# Altium PCB BLDC_Driver_1_1_2.PcbDoc
Units mil, origin at the board's own origin, x right, y up, seen from the top; angles counter-clockwise.
Board outline 3451 x 3780 mil, 2 copper layers (Top Layer, Bottom Layer); 63 components, 54 nets, 177 pads, 25 vias.
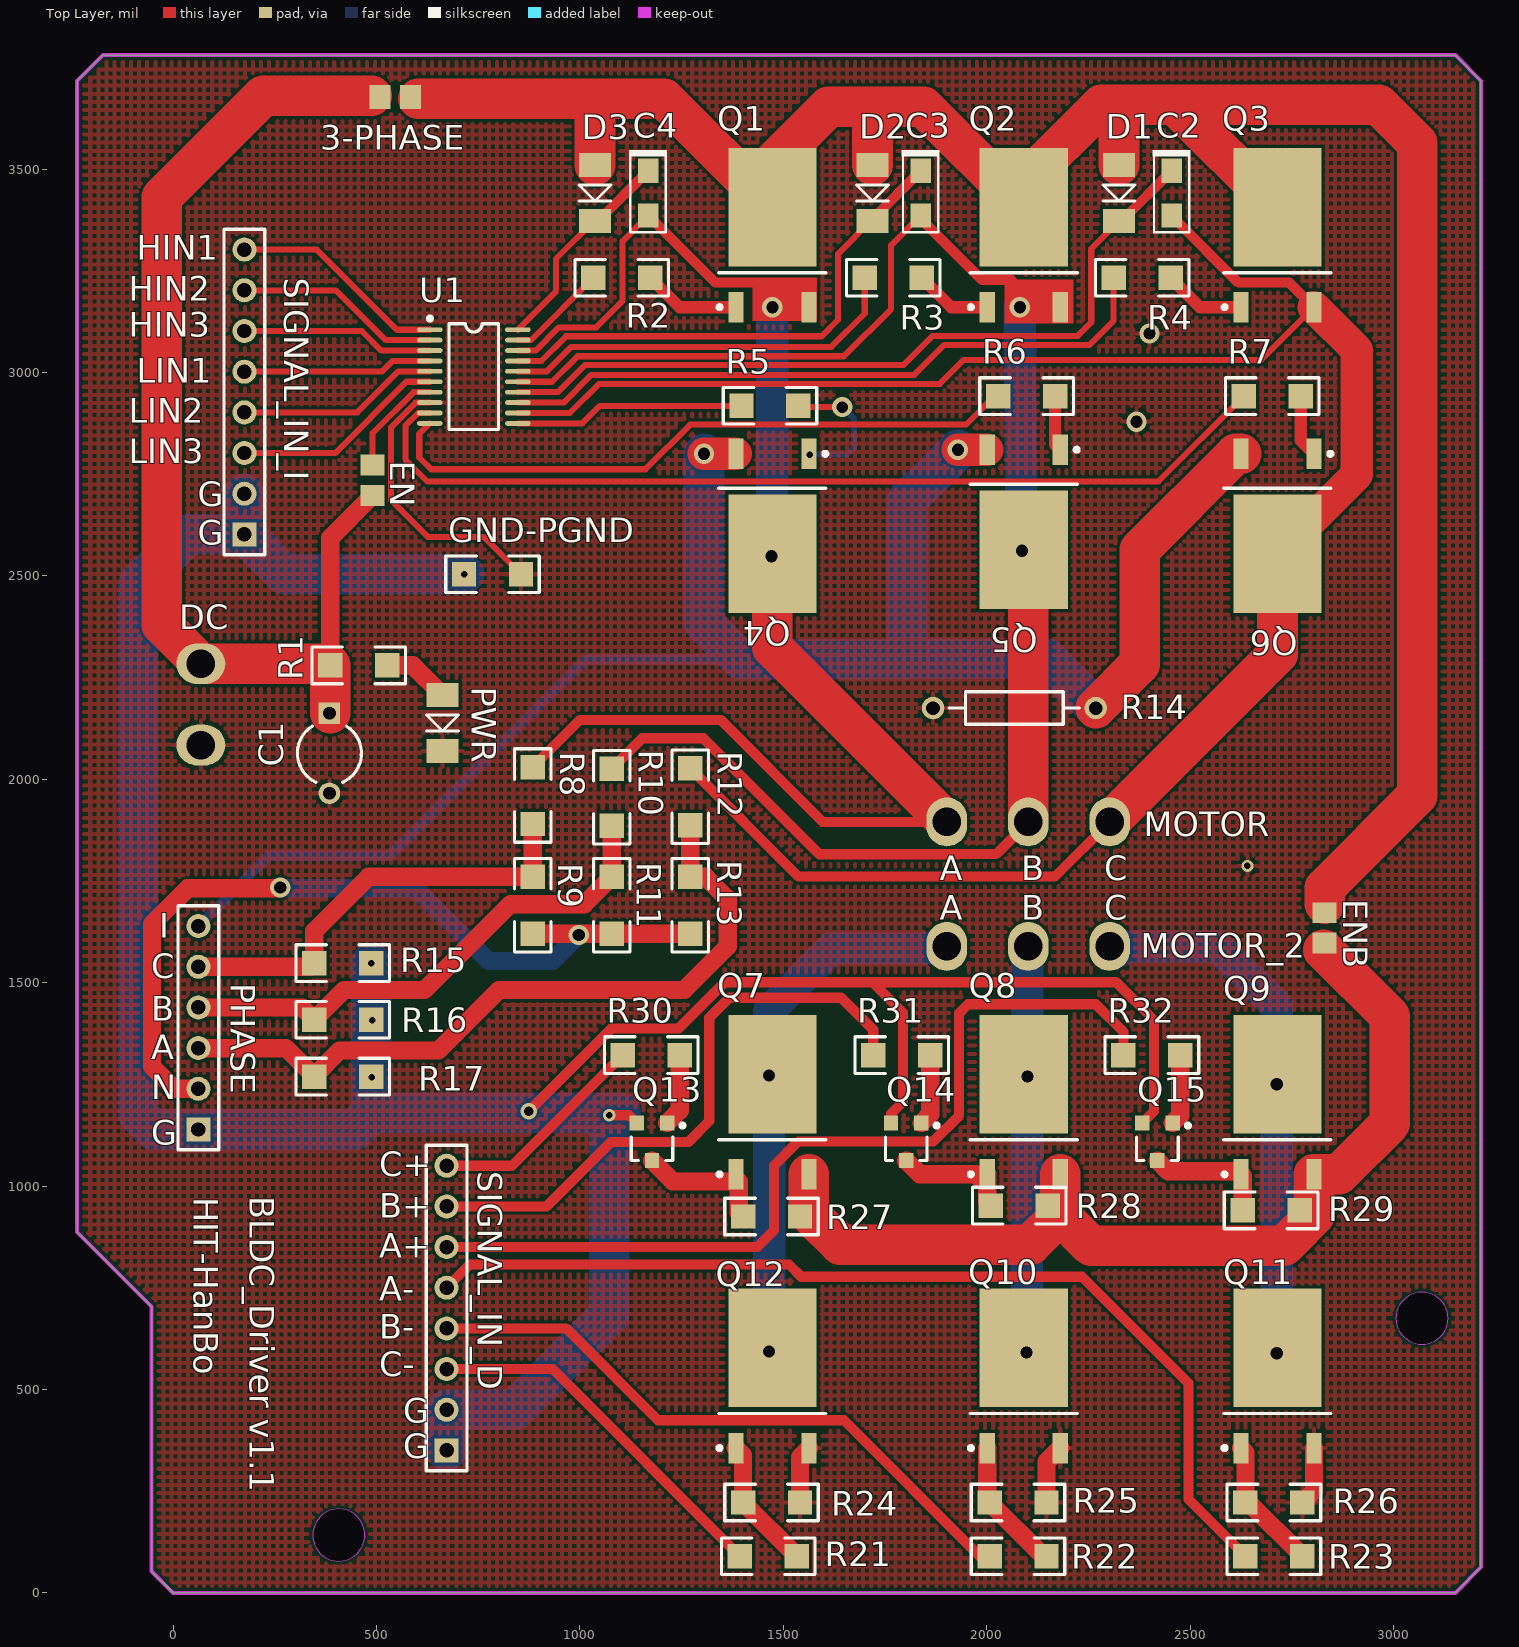
[diagram p0: Top Layer view]
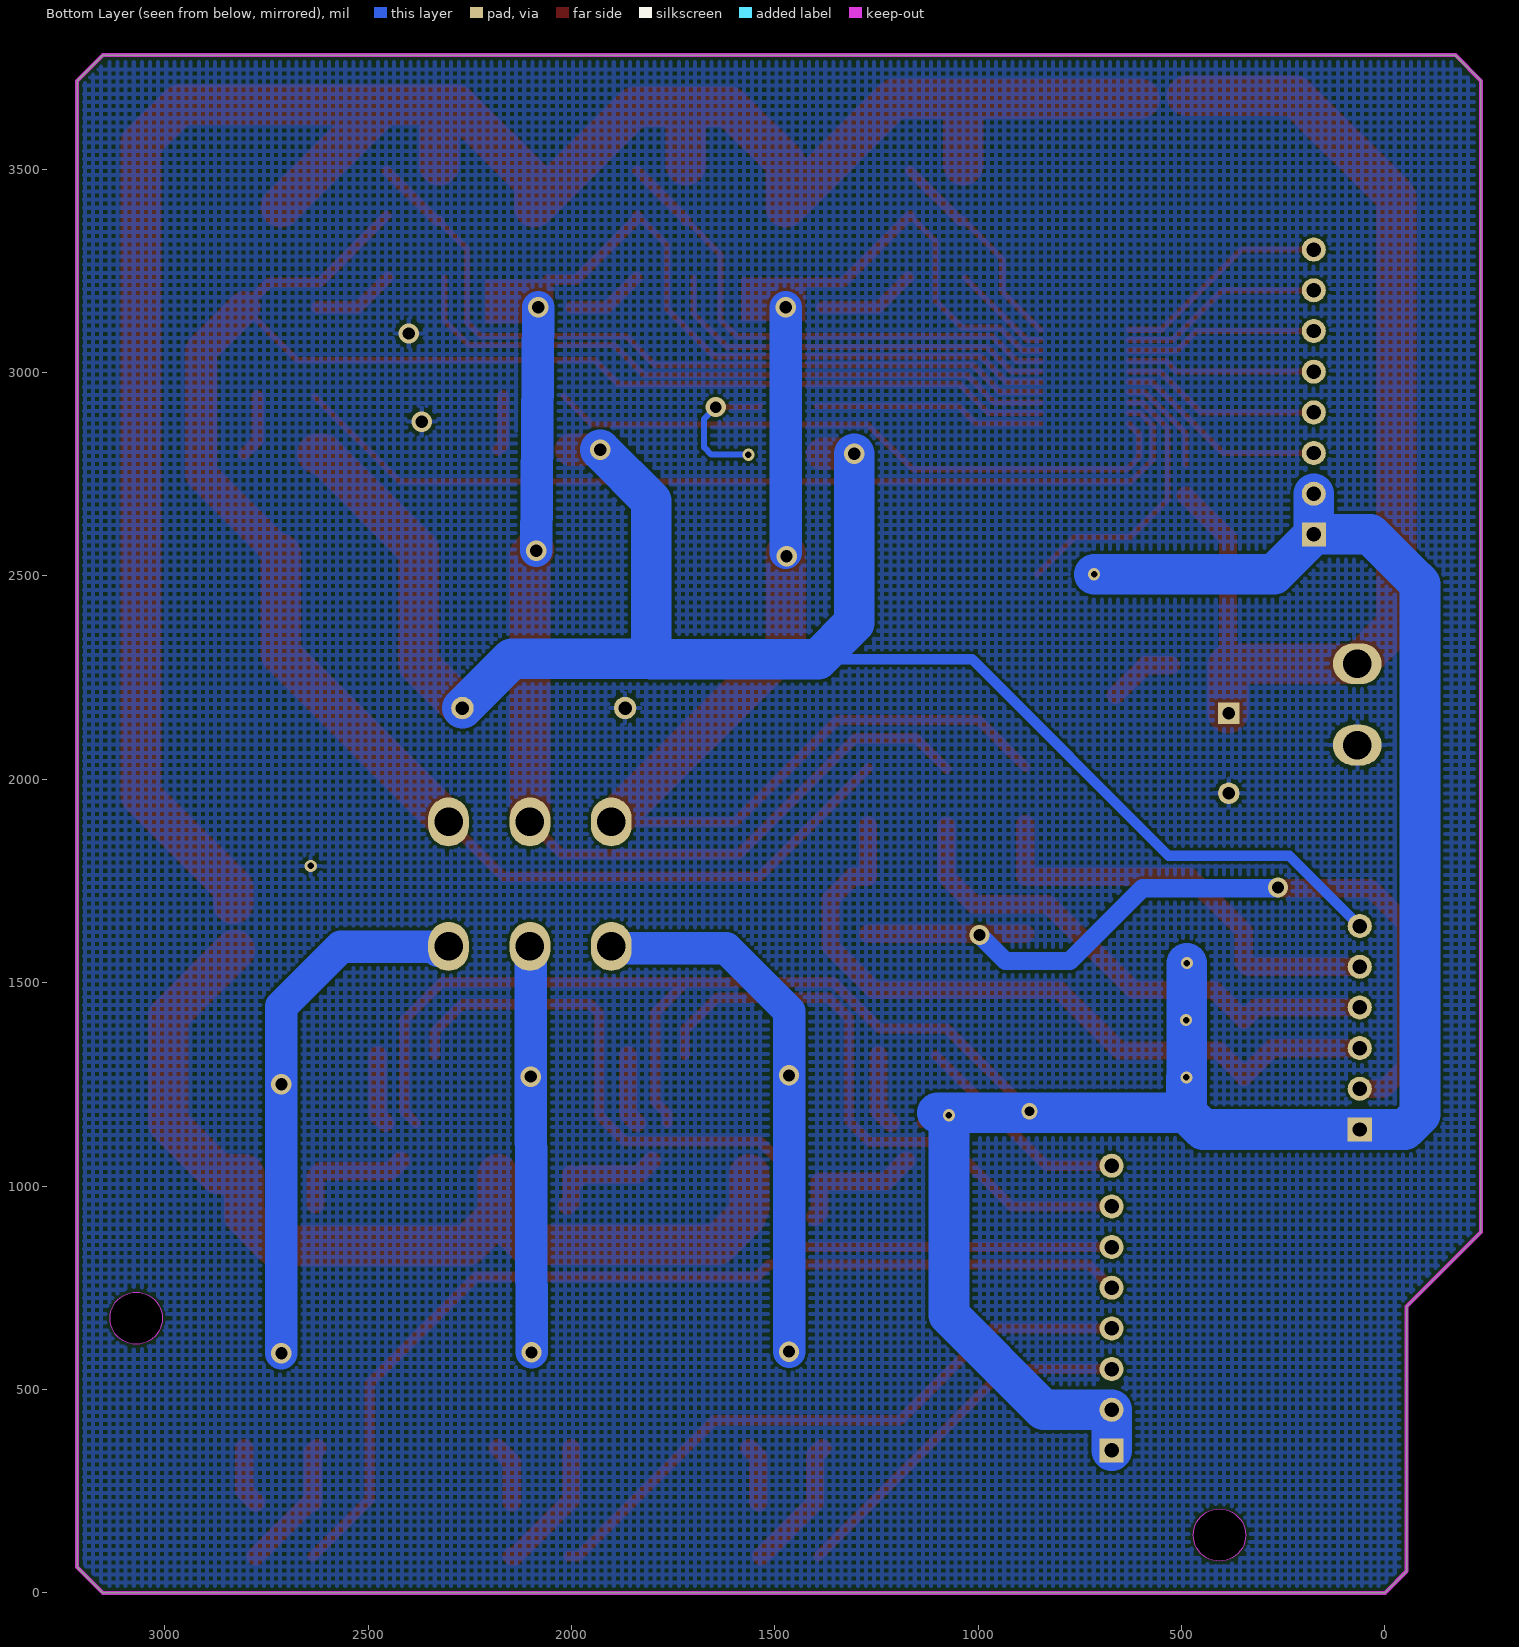
[diagram p1: Bottom Layer view, seen from below]

## Layer stack, top to bottom
Top Solder: solder mask 0.4, Solder Resist, Dk 3.5
Top Layer: signal copper 1.4
Dielectric 1: dielectric 12.6, FR-4, Dk 4.8
Bottom Layer: signal copper 1.4
Bottom Solder: solder mask 0.4, Solder Resist, Dk 3.5

## Board outline
-236,887 -53,704 -53,53 0,0 3152,0 3215,63 3215,3717 3152,3780 -173,3780 -236,3717
cut-out: 342.8,142 ccw(c407,142) 407,77.81 ccw(c407,142) 471.2,142 ccw(c407,142) 407,206.19 ccw(c407,142)
cut-out: 3005.81,675 ccw(c3070,675) 3070,610.81 ccw(c3070,675) 3134.19,675 ccw(c3070,675) 3070,739.19 ccw(c3070,675)

## Design rules (kind name [scope] priority, off if disabled: settings)
Clearance [All] p1: gap=7
PolygonConnect [All] p1: connectstyle=Relief reliefconductorwidth=10 reliefentries=4 polygonreliefangle="90 Angle" airgapwidth=10
RoutingVias [All] p1: holewidth=24 width=40 viastyle="Through Hole" minholewidth=18 minwidth=30 maxholewidth=28 maxwidth=50
SolderMaskExpansion [All] p1: expansion=4
Width [All] p1: maxlimit=100 minlimit=15 preferedwidth=20
30 further rules are at their usual default settings.

## Components (designator, comment, footprint, x,y, rotation, side; value= is the part's Value field where it differs from the comment)
3-PHASE "Res2" 0805-2 546,3677 r180 top
C1 "Cap2" CAPR5-4X5 384,2064 r270 top
C2 "Cap Pol" CAP-3216 2455,3441 r270 top
C3 "Cap Pol" CAP-3216 1838,3441 r270 top
C4 "Cap Pol" CAP-3216 1168,3441 r270 top
D1 "D-Schottky" DIODE-1206 2325,3510 r270 top
D2 "D-Schottky" DIODE-1206 1719,3510 r270 top
D3 "D-Schottky" DIODE-1206 1037,3510 r270 top
DC "JXZ2" JXZ2 68,2184 r90 top
EN "Res2" 0805-2 490,2735 r270 top
ENB "Res2" 0805-2 2830,1634.6 r90 top
GND-PGND "Res2" 1206 785,2504 r180 top
MOTOR "JXZ3" JXZ_3 2102,1895 r0 top
MOTOR_2 "JXZ3" JXZ_3 2102,1589 r0 top
PHASE "Header 6" HDR1X6 62,1139 r90 top
PWR "LED2" DIODE-1206 662,2207 r270 top
Q1 "IRFR1205" TO-252AA_N 1473,3337.62 r90 top
Q2 "IRFR1205" TO-252AA_N 2091.01,3337.62 r90 top
Q3 "IRFR1205" TO-252AA_N 2714.67,3337.62 r90 top
Q4 "IRFR1205" TO-252AA_N 1473,2622.9 r270 top
Q5 "IRFR1205" TO-252AA_N 2091.01,2632.9 r270 top
Q6 "IRFR1205" TO-252AA_N 2714.67,2623 r270 top
Q7 "IRFR5305" TO-252AA_N 1473,1206.1 r90 top
Q8 "IRFR5305" TO-252AA_N 2091.01,1206.1 r90 top
Q9 "IRFR5305" TO-252AA_N 2714.67,1206.1 r90 top
Q10 "IRFR1205" TO-252AA_N 2091.01,533 r90 top
Q11 "IRFR1205" TO-252AA_N 2714.67,533 r90 top
Q12 "IRFR1205" TO-252AA_N 1473,533 r90 top
Q13 "PDTC143ET" SOT-23 1177,1108.74 r180 top
Q14 "PDTC143ET" SOT-23 1802,1108.74 r180 top
Q15 "PDTC143ET" SOT-23 2419.6,1108.74 r180 top
R1 "Res2" 1206 456,2280 r180 top
R2 "Res2" 1206 1103,3233 r0 top
R3 "Res2" 1206 1770,3233 r0 top
R4 "Res2" 1206 2382,3233 r0 top
R5 "Res2" 1206 1467,2918 r0 top
R6 "Res2" 1206 2098,2942 r0 top
R7 "Res2" 1206 2702,2942 r0 top
R8 "Res2" 1206 884,1960 r270 top
R9 "Res2" 1206 884,1690 r270 top
R10 "Res2" 1206 1078,1956 r270 top
R11 "Res2" 1206 1078,1690 r270 top
R12 "Res2" 1206 1271,1957 r270 top
R13 "Res2" 1206 1271,1690 r270 top
R14 "Res2" AXIAL-0.4 2068,2175 r0 top
R15 "Res2" 1206 417,1548 r180 top
R16 "Res2" 1206 417,1409 r180 top
R17 "Res2" 1206 417,1269 r180 top
R21 "Res2" 1206 1463,90 r0 top
R22 "Res2" 1206 2077,90 r0 top
R23 "Res2" 1206 2706,90 r0 top
R24 "Res2" 1206 1471,222 r180 top
R25 "Res2" 1206 2077,222 r180 top
R26 "Res2" 1206 2706,222 r180 top
R27 "Res2" 1206 1471,925 r0 top
R28 "Res2" 1206 2080,952 r0 top
R29 "Res2" 1206 2699,940 r0 top
R30 "Res2" 1206 1175,1322 r0 top
R31 "Res2" 1206 1791,1322 r0 top
R32 "Res2" 1206 2406,1322 r0 top
SIGNAL_IN_D "Header 8" HDR1X8 672,350 r90 top
SIGNAL_IN_I "Header 8" HDR1X8 175,2602 r90 top
U1 "FD6288T" TSSOP20 739,2990 r270 top

## Footprints (in the part's own frame and the unit in brackets; to place one, negate y for a bottom-side part, rotate by r counter-clockwise, add the part's x,y. Pads: shape width x height; smd on the part's side, far side on the other; paste and mask are expansions set on the pad)
0805-2 [mm] "贴片无丝印"
  rect 1.3x1.5 smd: 1(-0.95,0) 2(0.95,0)
1206 [mil] "贴片元件"
  rect 60x60 smd: 1(-70,0) 2(70,0)
  silkscreen extent -115,-45 115,45, body extent -75,-35 75,35, height 39
AXIAL-0.4 [mm] "Axial Device, Thru-Hole; 2 Leads; 0.4 in Pin Spacing"
  round 1.4 hole 0.85: 1(-5.08,0) 2(5.08,0)
  silkscreen extent -4.06,-1.02 4.06,1.02
CAP-3216 [mil] "钽电容"
  rect 60x50 smd: 1(-55,0) 2(55,0)
  silkscreen extent -106,-48 96,46
CAPR5-4X5 [mm] "Capacitor; 2 Leads"
  rect 1.35x1.35 hole 0.8: 1(-2.5,0)
  round 1.35 hole 0.8: 2(2.5,0)
  silkscreen extent -1.69,-2 1.82,2
DIODE-1206 [mm] "玻璃封装二极管"
  rect 1.5x2 smd: 1(0,0) 2(3.5,0)
  silkscreen extent 1.25,-1 2.25,1
HDR1X6 [mm] "Connector; Header; 6 Position"
  rect 1.5x1.5 hole 0.9: 1(0,0)
  round 1.5 hole 0.9: 2(2.54,0) 3(5.08,0) 4(7.62,0) 5(10.16,0) 6(12.7,0)
  silkscreen extent -1.27,-1.27 13.97,1.27
HDR1X8 [mm] "Connector; Header; 8 Position"
  rect 1.5x1.5 hole 0.9: 1(0,0)
  round 1.5 hole 0.9: 2(2.54,0) 3(5.08,0) 4(7.62,0) 5(10.16,0) 6(12.7,0) 7(15.24,0) 8(17.78,0)
  silkscreen extent -1.27,-1.27 19.05,1.27
JXZ2 [mil]
  oval 100x120 hole 70: 1(100,0) 2(-100,0)
JXZ_3 [mil]
  oval 100x120 hole 70: 1(-200,0) 2(0,0) 3(200,0)
SOT-23 [mm]
  rect 0.9x0.95 smd: 1(-0.95,-1.175) 2(0.95,-1.175) 3(0,1.175)
  silkscreen extent -2.03,-1.14 1.3,1.18
TO-252AA_N [mm] "D-PAK, 4-Leads, Body 6.1x6.5mm, Pitch 2.28mm, Lead Span 9.9mm, IPC Medium Density"
  rect 1.9x0.95 smd: 1(-4.5,2.28) 3(-4.5,-2.28)
  rect 7.4x5.5 smd: 4(1.75,0)
  silkscreen extent -4.62,-3.35 -2.35,3.43, body extent -2.25,-3.37 4.1,3.37, height 2.38
TSSOP20 [mm] "Shrink Small Outline; 20 Leads; Body Width 4.4 mm; Pitch 0.65 mm"
  oval 0.3x1.6 smd: 1(-2.925,-2.75) 2(-2.275,-2.75) 3(-1.625,-2.75) 4(-0.975,-2.75) 5(-0.325,-2.75) 6(0.325,-2.75) 7(0.975,-2.75) 8(1.625,-2.75) 9(2.275,-2.75) 10(2.925,-2.75) 11(2.925,2.75) 12(2.275,2.75) 13(1.625,2.75) 14(0.975,2.75) 15(0.325,2.75) 16(-0.325,2.75) 17(-0.975,2.75) 18(-1.625,2.75) 19(-2.275,2.75) 20(-2.925,2.75)
  silkscreen extent -3.75,-2.87 3.3,1.55, body extent -3.3,-1.91 3.3,1.91, height 1.1

## Part data
3-PHASE EN ENB GND-PGND R1 R2 R3 R4 R5 R6 R7 R8 R9 R10 R11 R12 R13 R14 R15 R16 R17 R21 R22 R23 R24 R25 R26 R27 R28 R29 R30 R31 R32: "Resistor"
C1: "Capacitor"
C2 C3 C4: "极性电解电容"
D1 D2 D3: "肖特基二极管"
PHASE: "Header, 6-Pin"
PWR: "Typical RED, GREEN, YELLOW, AMBER GaAs LED"
Q1 Q2 Q3 Q4 Q5 Q6 Q7 Q8 Q9 Q10 Q11 Q12: "HEXFET Power MOSFET"
Q13 Q14 Q15: library part SS8050, "NPN贴片三极管"
SIGNAL_IN_D SIGNAL_IN_I: "Header, 8-Pin"

## Via types
v1: diameter 50, hole 30, Top Layer to Bottom Layer, 16 vias
v2: diameter 30, hole 16, Top Layer to Bottom Layer, 7 vias
v3: diameter 50, hole 28, Top Layer to Bottom Layer, 1 vias
v4: diameter 40, hole 24, Top Layer to Bottom Layer, 1 vias

## Nets (pads, with @x,y where several pads share a name; then routed paths per layer and width w, separated by ;. In a path a pad name is that pad's centre, name@x,y a point inside that pad or via, vN(x,y) a via of type N, cw(c..) or ccw(c..) an arc to the next point about the centre after c; other vN are vias at no path point)
A+: R30.1 SIGNAL_IN_D.8 | length 545.7
  Top Layer w25: SIGNAL_IN_D.8 833,1050 R30.1
A-: R21.1 SIGNAL_IN_D.3 | length 911.5
  Top Layer w25: SIGNAL_IN_D.3 933,550 R21.1
B+: R31.1 SIGNAL_IN_D.7 | length 1505
  Top Layer w25: SIGNAL_IN_D.7 918,950 1076,1108 1266,1108 1318,1160 1318,1414 1367,1463 1642,1463 1721,1384 R31.1
B-: R22.1 SIGNAL_IN_D.4 | length 1567
  Top Layer w25: SIGNAL_IN_D.4 966,650 1192,424 1649,424 1983,90 R22.1
C+: R32.1 SIGNAL_IN_D.6 | length 2237.2
  Top Layer w25: SIGNAL_IN_D.6 1436,850 1477,891 1477,1050 1536.83,1109.83 1868.83,1109.83 1932,1173 1932,1425 1954,1447 2268,1447 2336,1379 R32.1
C-: R23.1 SIGNAL_IN_D.5 | length 2451.7
  Top Layer w25: SIGNAL_IN_D.5 729,807 1514,807 1544,777 2234.26,777 2496,515.26 2496,230 R23.1
DC-SEL: 3-PHASE.1 D1.1 D2.1 D3.1 ENB.2 Q1.4 Q2.4 Q3.4 | length 5807.7
  Top Layer w100: 3-PHASE.1@603,3673 1048,3673 ; D3.1 1037,3662 1048,3673 ; D2.1 1719,3653 ; D1.1 2325,3615 2282,3658 ; Q3.4 2463.19,3658 ; ENB.2@2831,1694 2831,1733 3058,1960 3058,3564 2964,3658 2463.19,3658 ; 1048,3673 1206.52,3673 Q1.4 1473,3515 1611,3653 1719,3653 ; 1719,3653 1844.53,3653 Q2.4 2091.01,3467.01 2282,3658 ; 2282,3658 2463.19,3658
DC_IN: 3-PHASE.2 C1.1 DC.1 EN.2 R1.2 | length 2697.8
  Top Layer w45: R1.2 386,2593.6 EN.2
  Top Layer w100: R1.2@381,2281 378,2284 DC.1 -28,2380 -28,3431 221,3680 3-PHASE.2@487.41,3680 ; C1.1@386,2162.43 R1.2
GND: GND-PGND.2 PHASE.1 Q13.2 Q14.2 Q15.2 R15.1 R16.1 R17.1 SIGNAL_IN_D.1 SIGNAL_IN_D.2 SIGNAL_IN_I.1 SIGNAL_IN_I.2 | length 7409.8
  Top Layer w25: v4(874,1184) 1077,1387 1242,1387 1356,1501 1719,1501 ; v2(1072,1174) 1120.6,1174 Q13.2 ; Q14.2 1764.6,1177.6 1794,1207 1794,1426 1719,1501 ; Q15.2 2411,1183.8 2411,1408 2318,1501 1719,1501
  Bottom Layer w25: v4(874,1184) v4@874,1185
  Bottom Layer w100: -80,2488 -80,2486 ; SIGNAL_IN_I.2 SIGNAL_IN_I.1 ; v2(487,1548) 487,1268 v2(488,1267) 488,1180 ; SIGNAL_IN_D.1 SIGNAL_IN_D.2 839,450 1072,683 v2(1072,1174) ; v2(715,2504) 273,2504 SIGNAL_IN_I.1 ; 1100,1180 488,1180 ; -80,2486 -86,2480 -86,1176 -49,1139 PHASE.1 447,1139 488,1180 ; -80,2486 36,2602 SIGNAL_IN_I.1
  other v2: 489,1408
HIN1: SIGNAL_IN_I.8 U1.1 | length 537.3
  Top Layer w15: SIGNAL_IN_I.8 353,3302 549.84,3105.16 U1.1
HIN2: SIGNAL_IN_I.7 U1.2 | length 506.4
  Top Layer w15: SIGNAL_IN_I.7 400,3202 522.43,3079.57 U1.2
HIN3: SIGNAL_IN_I.6 U1.3 | length 475.6
  Top Layer w15: SIGNAL_IN_I.6 464,3102 512.02,3053.98 U1.3
HO1: R2.1 U1.19 | length 249.3
  Top Layer w15: U1.19 879.57,3079.57 R2.1
HO2: R3.1 U1.16 | length 999.6
  Top Layer w15: U1.16 918.8,3002.8 979,3063 1618,3063 1700,3145 R3.1
HO3: R4.1 U1.13 | length 1654
  Top Layer w15: U1.13 960.02,2926.02 1028,2994 1822,2994 1896,3068 2253,3068 2312,3127 R4.1
LIN1: SIGNAL_IN_I.5 U1.4 | length 466.7
  Top Layer w15: SIGNAL_IN_I.5 513,3002 539.39,3028.39 U1.4
LIN2: SIGNAL_IN_I.4 U1.5 | length 497.5
  Top Layer w15: SIGNAL_IN_I.4 453,2902 553.8,3002.8 U1.5
LIN3: SIGNAL_IN_I.3 U1.6 | length 528.3
  Top Layer w15: SIGNAL_IN_I.3 398,2802 573.2,2977.2 U1.6
LO1: R5.1 U1.11 | length 567.6
  Top Layer w15: U1.11 1005.84,2874.84 1049,2918 R5.1
LO2: R6.1 U1.10 | length 1595.1
  Top Layer w15: U1.10 605,2849.11 605,2791 634,2762 1161,2762 1271,2872 1949,2872 R6.1@2019,2942
LO3: R7.1 U1.9 | length 2326.4
  Top Layer w15: U1.9 601.87,2900.43 571,2869.56 571,2786 625,2732 2422,2732 R7.1
MOTOR_A: C4.2 MOTOR.1 Q1.3 Q4.4 R8.1 U1.18 | length 3629.8
  Top Layer w15: U1.18 890.98,3053.98 948,3111 1040,3111 1105,3176 1105,3323 C4.2
  Top Layer w25: R8.1 1000,2146 1346,2146 1597,1895 MOTOR.1 ; C4.2 1333,3221 1438,3221 1463,3196 1527.22,3196 Q1.3@1553.61,3169.61
  Top Layer w100: Q4.4 1473,2324 MOTOR.1
  Bottom Layer w80: v1@1473,2557 v1(1473,3160.46)
  other v1: 1471,2548
MOTOR_A_1: MOTOR_2.1 Q7.4 Q12.4 | length 1337.1
  Bottom Layer w80: v1(1465,593) v1(1465,1272) 1465,1430 1619,1584 1890,1584 MOTOR_2.1@1898,1576
MOTOR_B: C3.2 MOTOR.2 Q2.3 Q5.4 R10.1 U1.15 | length 4200.9
  Top Layer w15: U1.15 931.2,2977.2 994,3040 1649,3040 1765,3156 1765,3313 C3.2
  Top Layer w25: R10.1 1153,2101 1303,2101 1588.5,1815.5 1930.79,1815.5 1931.29,1816 2023,1816 MOTOR.2 ; C3.2 1838,3378.01 1988.01,3228 2059,3228 2072,3215 2178.01,3215 2175.78,3160.66 Q2.3@2175.77,3160.46
  Top Layer w100: Q5.4 2102,2553.01 MOTOR.2
  Bottom Layer w80: v1(2081.46,3160.46) v1(2086.46,2561.54)
MOTOR_B_2: MOTOR_2.2 Q8.4 Q10.4 | length 962
  Bottom Layer w80: v1(2098,591) v1(2100,1269) MOTOR_2.2@2100,1553
MOTOR_C: C2.2 MOTOR.3 Q3.3 Q6.4 R12.1 U1.12 | length 5266.2
  Top Layer w15: U1.12 975.43,2900.43 1047,2972 1885,2972 1944,3031 2674.98,3031 Q3.3
  Top Layer w25: R12.1 1537,1761 2168,1761 MOTOR.3 ; C2.2 2455,3384.67 2618.67,3221 2743.89,3221 Q3.3
  Top Layer w80: Q6.4 2910,2749.43 2910,3054.89 Q3.3
  Top Layer w100: MOTOR.3 2714.67,2307.67 Q6.4
MOTOR_C_3: MOTOR_2.3 Q9.4 Q11.4 | length 1302.2
  Bottom Layer w80: MOTOR_2.3@2328,1579 2337,1588 2567,1588 2713,1442 v1(2713,1250) v1(2713,589)
NEG: PHASE.2 R9.2 R11.2 R13.2 | length 2061.5
  Top Layer w45: PHASE.2 3,1239 -52,1294 -52,1644 36,1732 261,1732 v1(263,1734) ; R9.2 R11.2 R13.2
  Bottom Layer w45: v1(263,1734) 265,1732 596,1732 775,1553 933,1553 v1(997,1617)
NetC2_1: C2.1 D1.2 U1.14 | length 1939.4
  Top Layer w15: U1.14 945.61,2951.61 1012,3018 1795,3018 1867,3090 2224,3090 2257,3123 2257,3304.2 D1.2
  Top Layer w25: D1.2 2331.2,3372.2 C2.1
NetC3_1: C3.1 D2.2 U1.17 | length 1283.9
  Top Layer w15: U1.17 905.39,3028.39 966,3089 1594,3089 1634,3129 1634,3291.2 D2.2@1719,3376.2
  Top Layer w25: D2.2 1719,3376.2 1719,3377 C3.1
NetC4_1: C4.1 D3.2 U1.20 | length 530.7
  Top Layer w15: U1.20 941,3198.89 941,3279 D3.2@1037,3375
  Top Layer w25: D3.2 1044.2,3372.2 C4.1
NetEN_1: EN.1 U1.7 | length 260.9
  Top Layer w15: EN.1 490,2850.78 590.83,2951.61 U1.7
NetENB_1: ENB.1 Q7.3 Q8.3 Q9.3 R27.2 R28.2 R29.2 | length 2370.5
  Top Layer w100: R27.2@1562.76,945.76 Q7.3 ; 1572,924 1640,856 2108,856 2180.77,928.77 ; Q8.3 2180.77,928.77 ; ENB.1@2828,1580.41 2991,1417.41 2991,1154 2865.94,1028.94 Q9.3 2804.43,927.43 2776,899 2776,898.39 2730.61,853 2256.54,853 2180.77,928.77
NetPWR_1: PWR.1 R1.1 | length 166.2
  Top Layer w45: R1.1 589,2280 PWR.1
NetQ1_1: Q1.1 R2.2 | length 240.3
  Top Layer w30: R2.2 1245.54,3160.46 Q1.1
NetQ2_1: Q2.1 R3.2 | length 191.3
  Top Layer w30: R3.2 1912.54,3160.46 Q2.1
NetQ3_1: Q3.1 R4.2 | length 203
  Top Layer w30: R4.2 2524.54,3160.46 Q3.1
NetQ4_1: Q4.1 R5.2 | length 336.7
  Top Layer w15: R5.2 1540,2915 v3(1645,2915)
  Bottom Layer w15: v2(1565,2798) 1656,2798 1674,2816 1674,2886 v3(1645,2915)
NetQ5_1: Q5.1 R6.2 | length 137.2
  Top Layer w30: R6.2 2168,2822.83 Q5.1
NetQ6_1: Q6.1 R7.2 | length 155.3
  Top Layer w30: R7.2 2772,2832.6 Q6.1
NetQ7_1: Q7.1 Q13.3 R27.1 | length 326
  Top Layer w45: Q13.3 1228.31,1011.17 1390,1011.17 1390,935 R27.1@1401,924
NetQ8_1: Q8.1 Q14.3 R28.1 | length 285.7
  Top Layer w45: Q14.3 1835.54,1028.94 1974.06,1028.94 Q8.1@1987.65,1015.35 ; Q8.1 2001.24,960.76 R28.1
NetQ9_1: Q9.1 Q15.3 R29.1 | length 294.8
  Top Layer w45: Q15.3 2446.08,1036 2617.84,1036 Q9.1 2629,1024.84 R29.1@2629,955
NetQ10_1: Q10.1 R22.2 R25.2 | length 330.9
  Top Layer w45: Q10.1 2001.24,227.76 R25.2 2139,90 R22.2
NetQ11_1: Q11.1 R23.2 R26.2 | length 333.1
  Top Layer w45: Q11.1 2636,344.74 R26.2 2644,222 R23.2
NetQ12_1: Q12.1 R21.2 R24.2 | length 327.9
  Top Layer w45: Q12.1 1401,338.07 R24.2 R21.2
NetQ13_1: Q13.1 R30.2 | length 179.7
  Top Layer w45: Q13.1 1245,1185.6 R30.2
NetQ14_1: Q14.1 R31.2 | length 175.9
  Top Layer w45: Q14.1 1861,1176.6 R31.2
NetQ15_1: Q15.1 R32.2 | length 174.9
  Top Layer w45: Q15.1 2476,1174 R32.2
PGND: C1.2 DC.2 GND-PGND.1 PWR.2 Q10.3 Q11.3 Q12.3 R14.1 R24.1 R25.1 R26.1 U1.8 | length 1130.9
  Top Layer w15: U1.8 596.35,2926.02 535,2864.67 535,2687 626,2596 763,2596 GND-PGND.1
  Top Layer w45: R24.1 1541,334.07 Q12.3 ; R25.1 2147,322.06 Q10.3 ; R26.1 2804.43,250.43 Q11.3
  other v1: 2368,2879 2400,3096
  other v2: 2641,1787
SENSE_A: PHASE.5 R8.2 R9.1 R15.2 | length 1085.8
  Top Layer w45: PHASE.5 338,1539 R15.2 347,1627 480,1760 R9.1 ; R9.1@884,1764 R8.2
SENSE_B: PHASE.4 R10.2 R11.1 R16.2 | length 1299.8
  Top Layer w45: PHASE.4 317,1439 R16.2 420,1482 618,1482 829,1693 1011,1693 R11.1 R10.2
SENSE_C: PHASE.3 R12.2 R13.1 R17.2 | length 1822.1
  Top Layer w45: PHASE.3 277,1339 R17.2 347,1271 409,1333 652,1333 801,1482 1256,1482 1363,1589 1363,1706 1309,1760 R13.1 R12.2
SENSE_I: PHASE.6 Q4.3 Q5.3 Q6.3 R14.2 | length 4569.3
  Top Layer w45: v1(1304.94,2800.06) v1@1306.87,2802
  Top Layer w80: v1(1304.94,2800.06) Q4.3 ; v1(1929.06,2810.06) Q5.3
  Top Layer w100: R14.2 2376,2283 2376,2564 2612.17,2800.17 Q6.3
  Bottom Layer w25: PHASE.6 235,1812 532,1812 1015,2295 1394,2295
  Bottom Layer w100: v1(1304.94,2800.06) 1304.94,2384.06 1394,2295 1804,2295 ; v1(1929.06,2810.06) 1804,2685 1804,2296 2147,2296 R14.2

## Polygon pours and split planes (outlines as drawn)
PGND on Bottom Layer "PGND_L02_P014" (hatched 90Degree grid 20 track 10, remove dead copper, pour order 14): -252,3808 3217,3808 3217,49 3084,-84 3029,-29 -234,-29
PGND on Top Layer "PGND_L01_P016" (hatched 90Degree grid 20 track 10, remove dead copper, pour order 16): -219,3799 3244,3799 3274,3769 3249,3744 3249,-36 -238,-36 -250,-24 -250,3744

## Keep-outs
Keep-Out Layer:
  lines w10: -236,887 -236,3717 -173,3780 3152,3780 3215,3717 3215,63 3152,0 0,0 -53,53 -53,120 -53,704 -236,887

## Other copper
Top Layer:
  rectangle net MOTOR_A: 1424,3126 1583,3234
  rectangle net MOTOR_B: 2044,3121 2213,3228

## Silkscreen, mask and mechanical layers (free items; w line width, h text height)
Top Overlay:
  text "HIN1" at -89.01,3277 h60
  text "HIN2" at -109,3176 h60
  text "HIN3" at -109,3088 h60
  text "LIN1" at -89.01,2975 h60
  text "LIN2" at -109,2876 h60
  text "LIN3" at -109,2777 h60
  text "G" at 60.95,2671 h60
  text "G" at 60.95,2576 h60
  text "A" at 1885,1752 h60
  text "B" at 2085,1752 h60
  text "C" at 2289,1752 h60
  text "A" at 1885,1655 h60
  text "B" at 2085,1655 h60
  text "C" at 2289,1655 h60
  text "I" at -34.01,1610 h60
  text "C" at -54,1511 h60
  text "B" at -54,1406 h60
  text "A" at -54,1312 h60
  text "N" at -54,1213 h60
  text "G" at -54,1102 h60
  text "C+" at 506,1024 h60
  text "BLDC_Driver v1.1" at 188,975 h60 r270
  text "HIT-HanBo" at 51,972 h60 r270
  text "B+" at 506,922 h60
  text "A+" at 506,824 h60
  text "A-" at 506,718 h60
  text "B-" at 506,625 h60
  text "C-" at 506,532 h60
  text "G" at 565.98,418 h60
  text "G" at 565.98,331 h60
Mechanical 1:
  circle w10: c407,142 r64.19
  circle w10: c3070,675 r64.19